# Altium PCB Glog 5G_V1.PcbDoc (part 1 of 3)
Units mil, origin at the board's own origin, x right, y up, seen from the top; angles counter-clockwise.
Board outline 2165.35 x 3838.58 mil, 4 copper layers (Top Layer, GND, PWR, Bottom Layer); 183 components, 150 nets, 767 pads, 1532 vias.
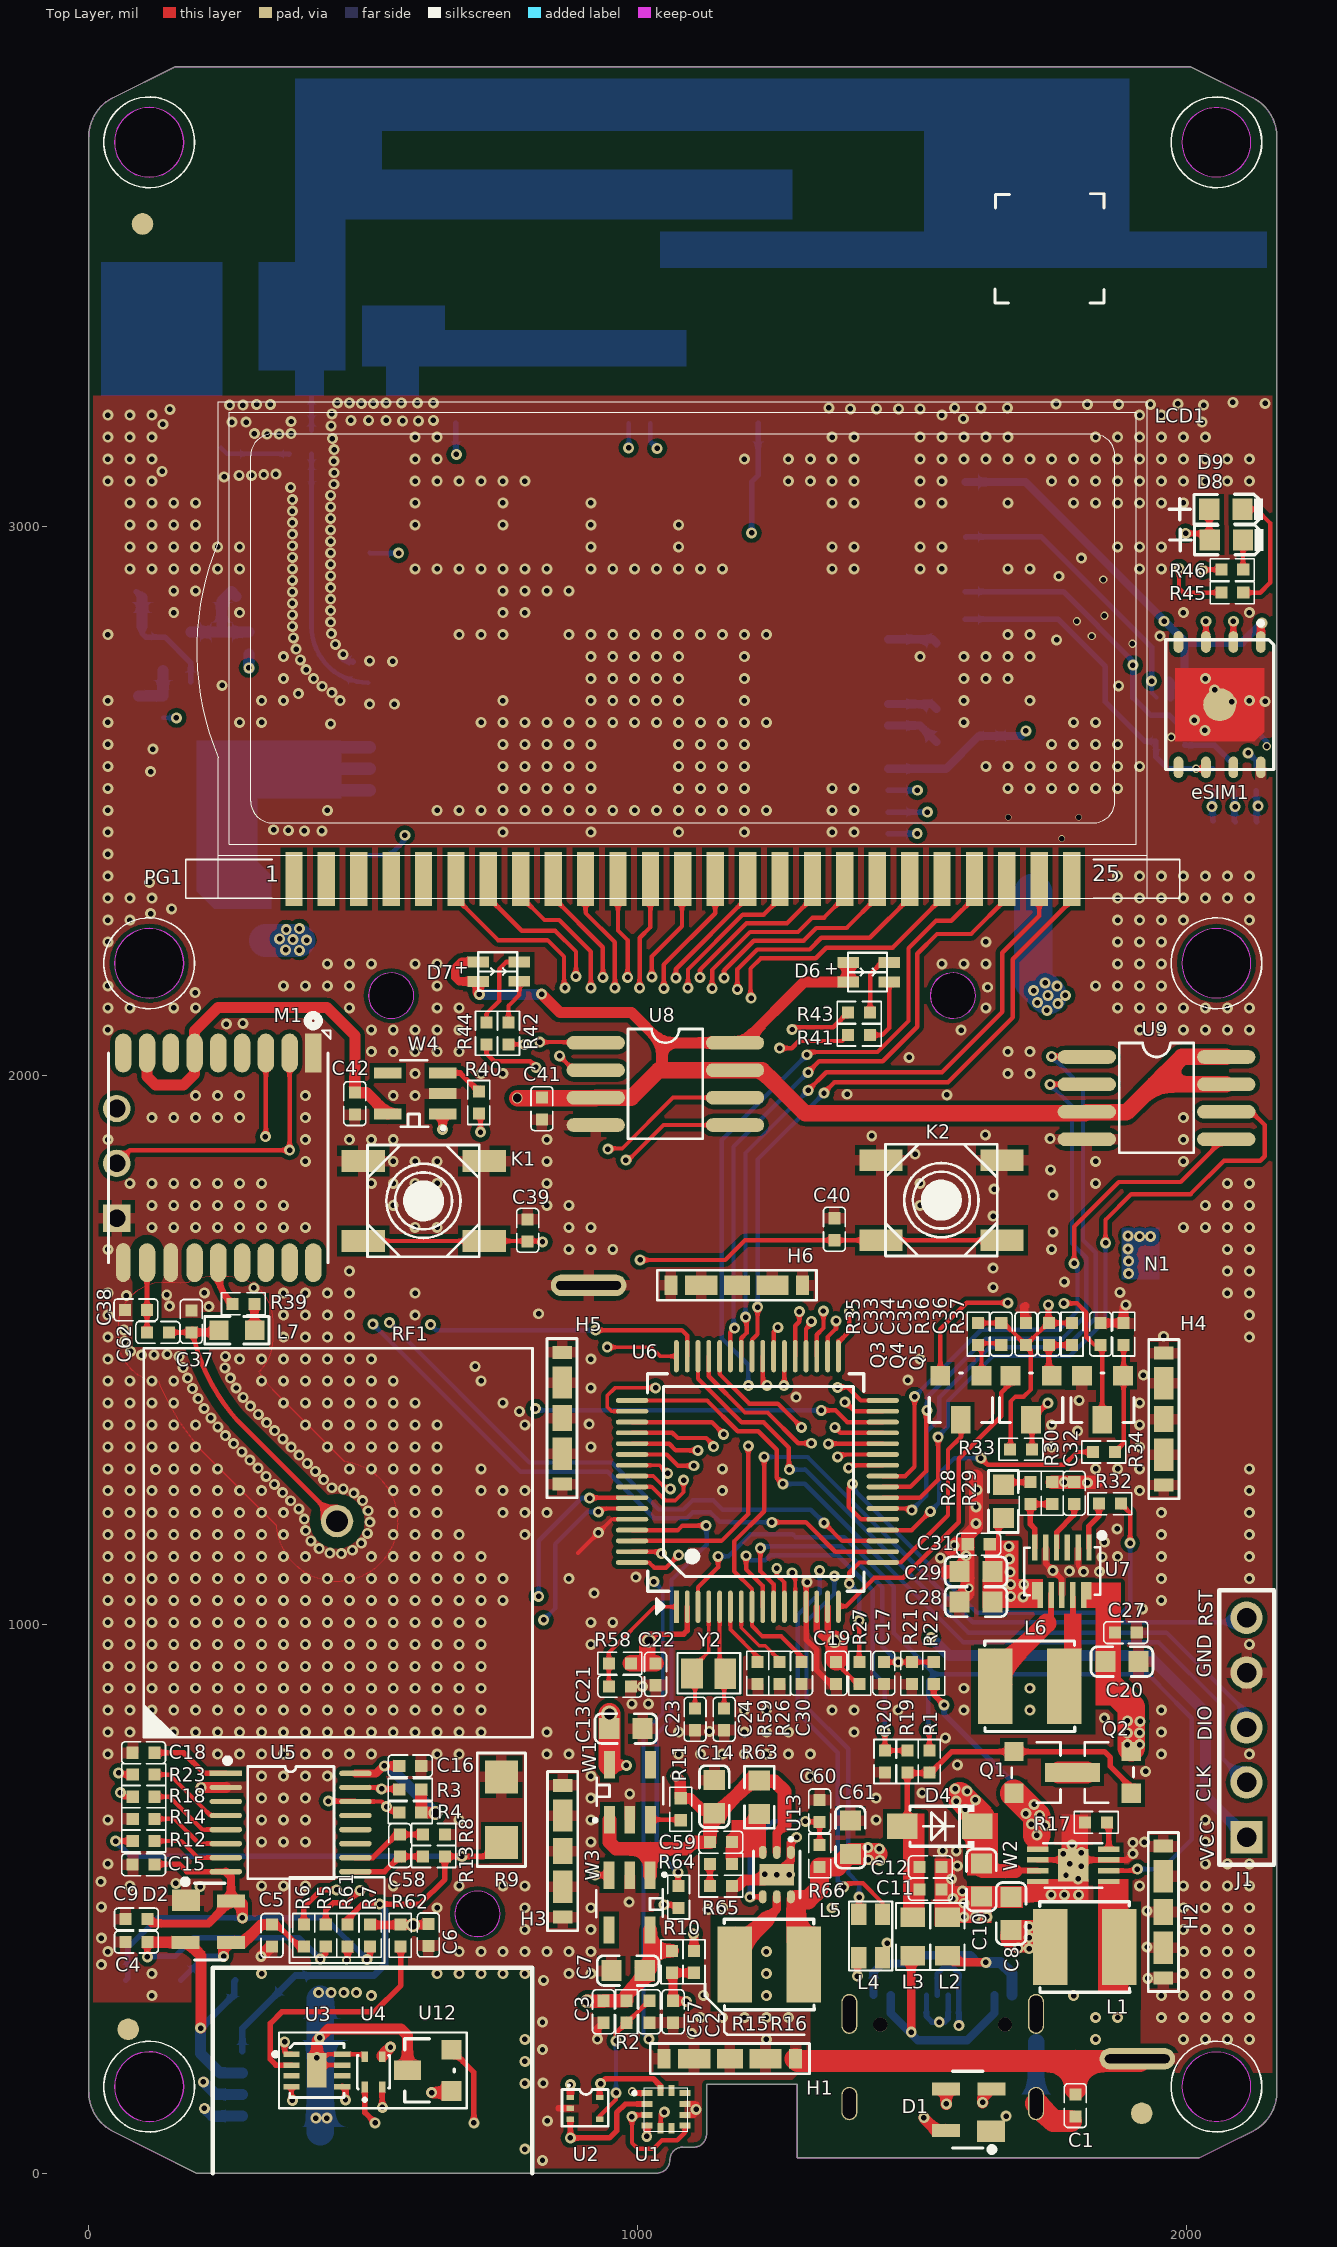
[diagram p0: Top Layer view]
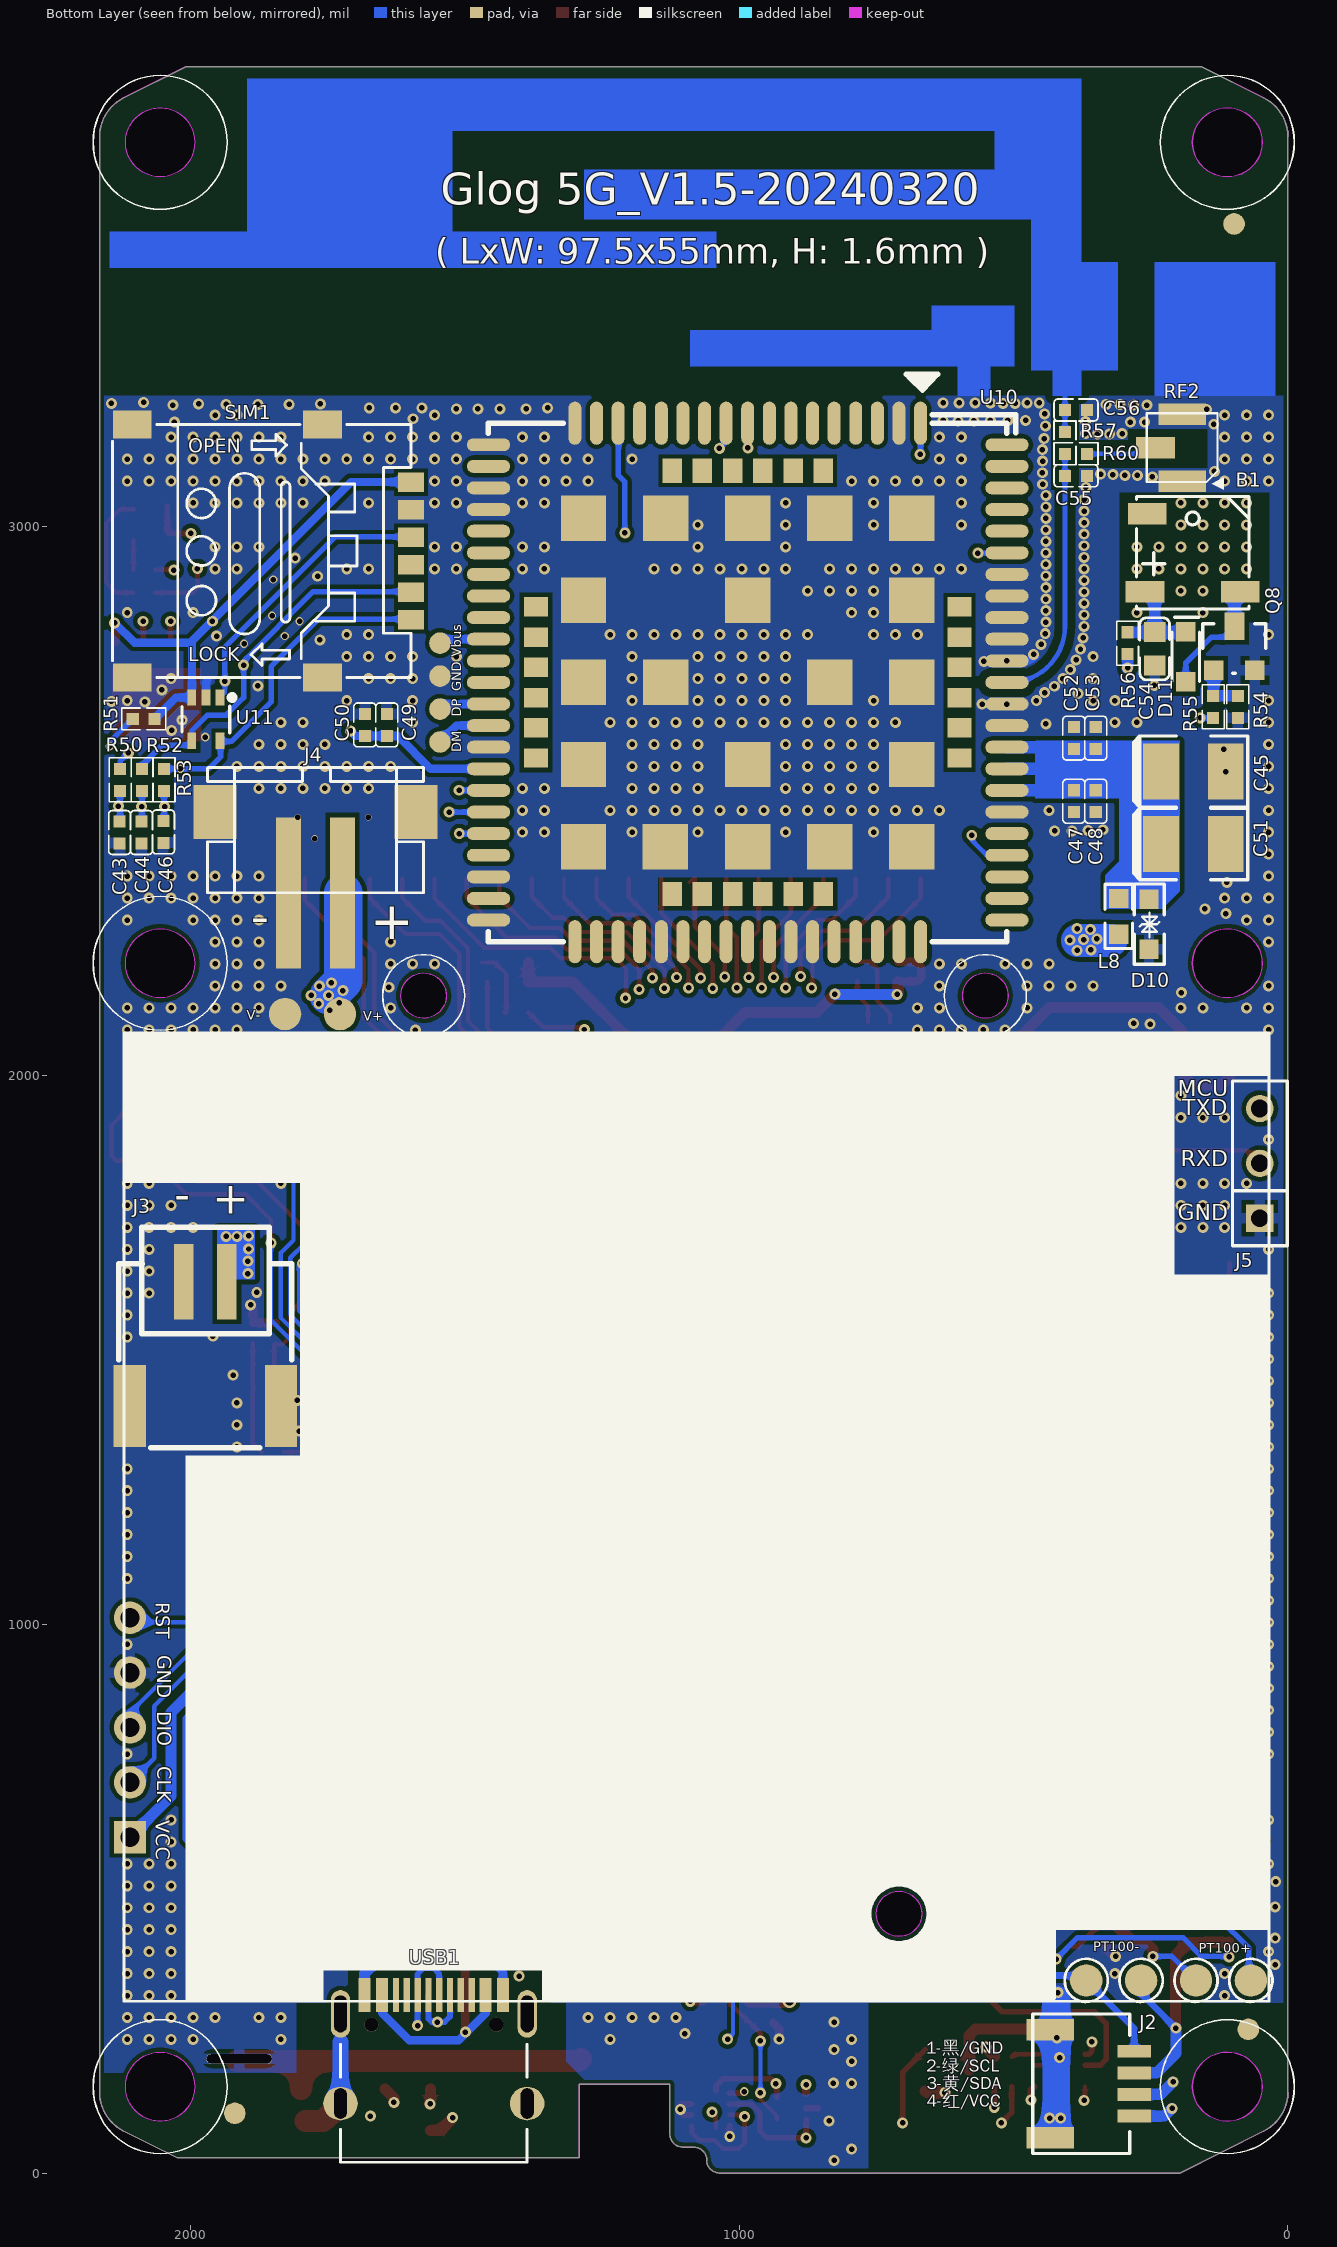
[diagram p1: Bottom Layer view, seen from below]
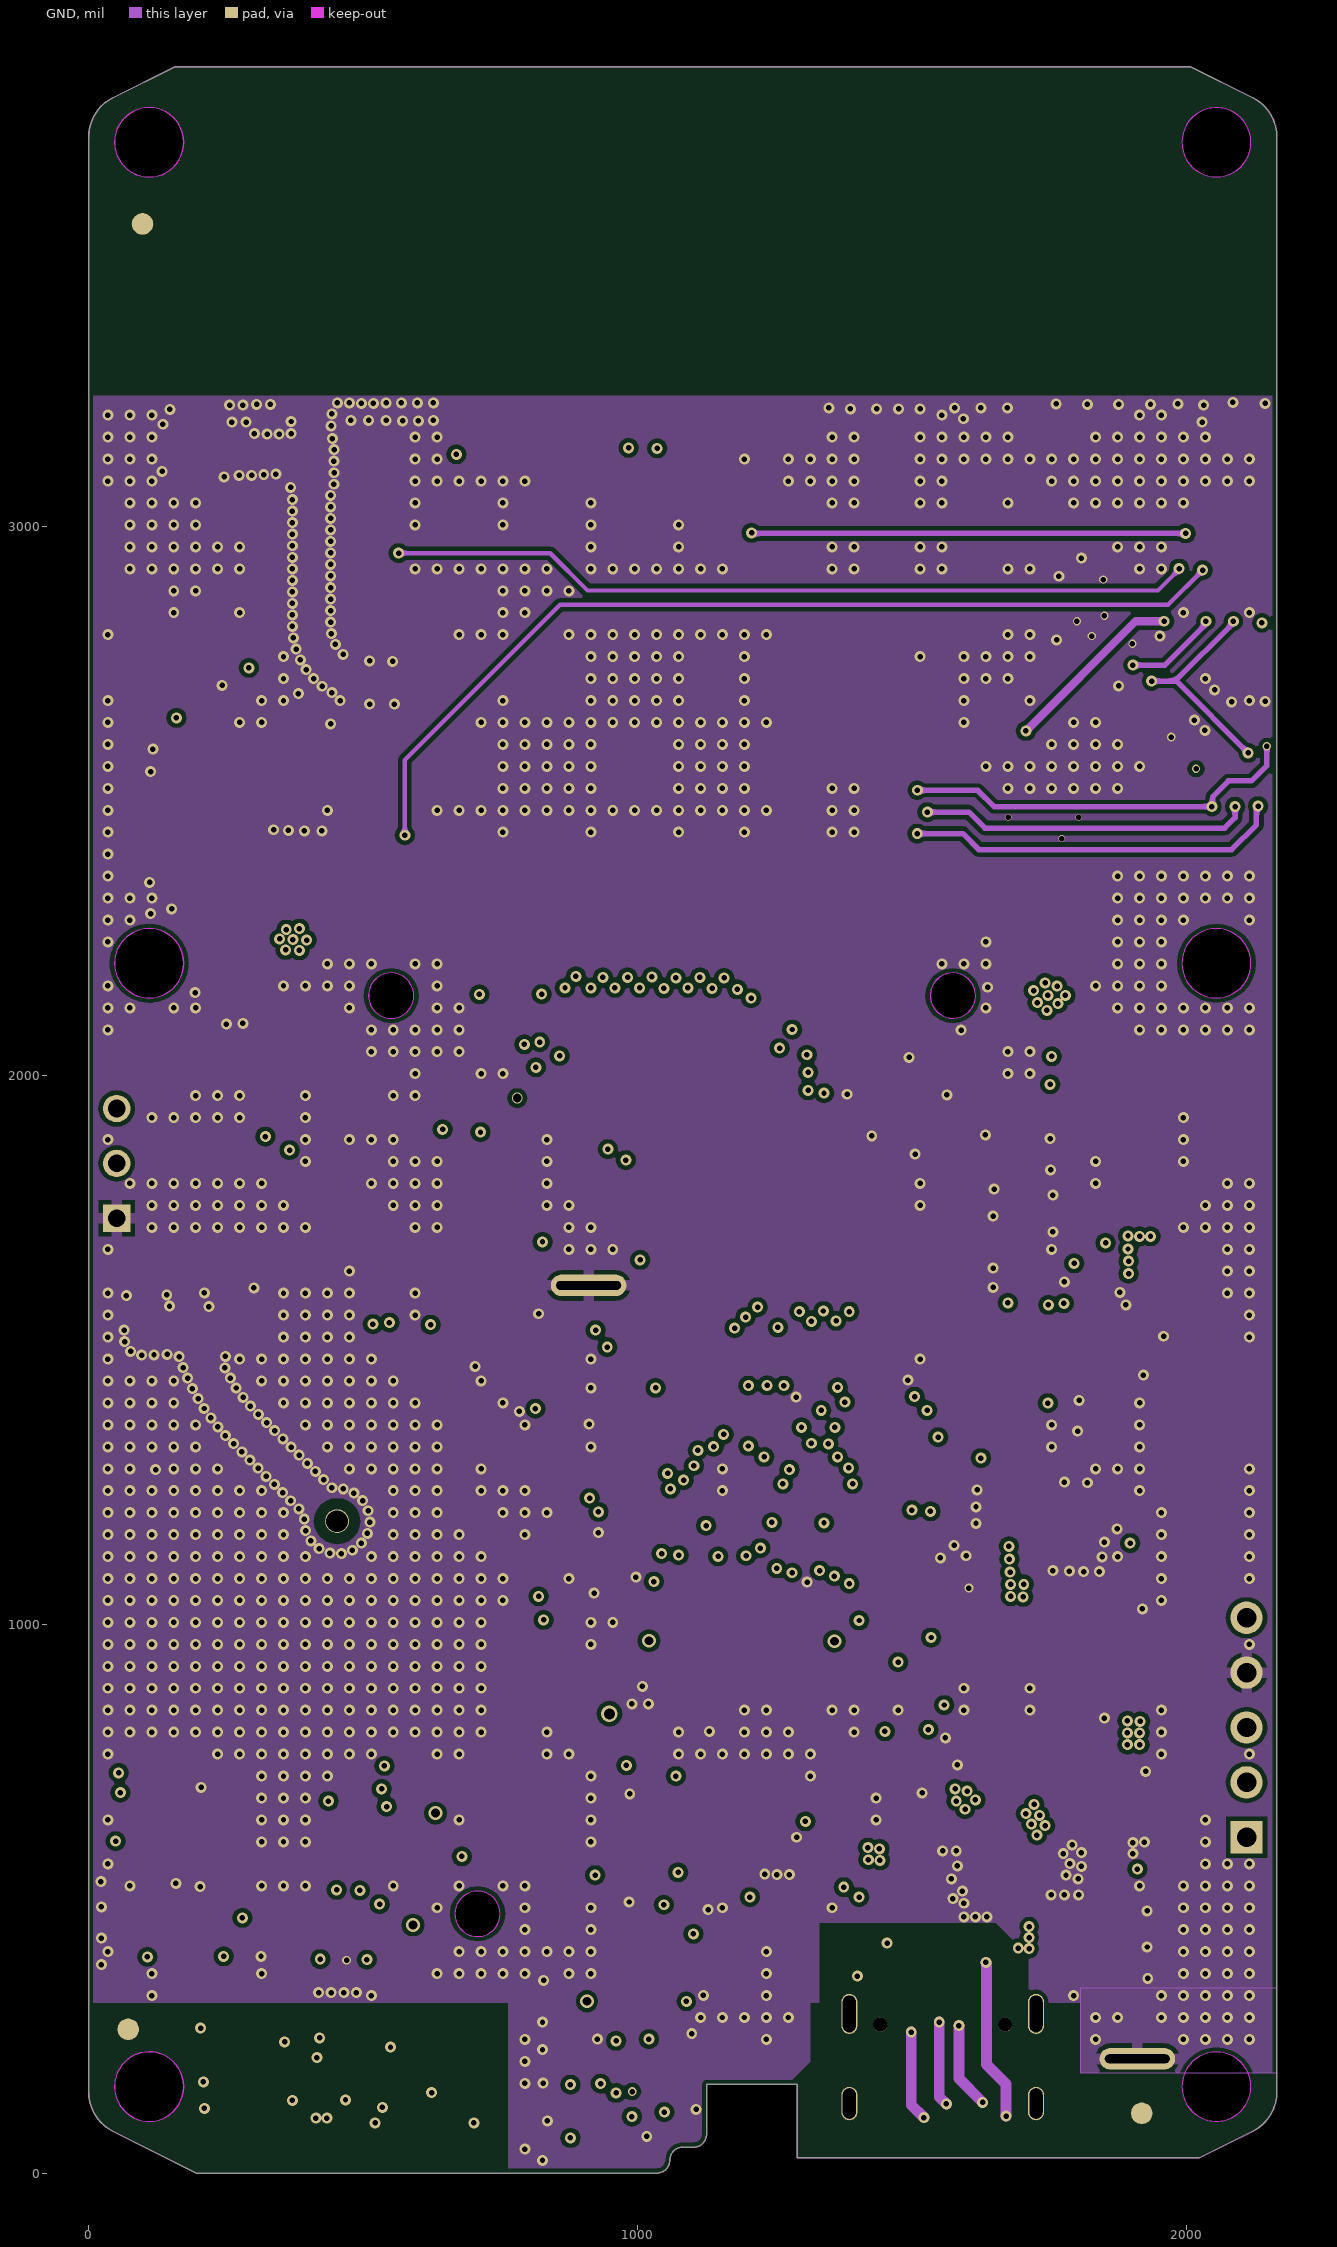
[diagram p2: GND]
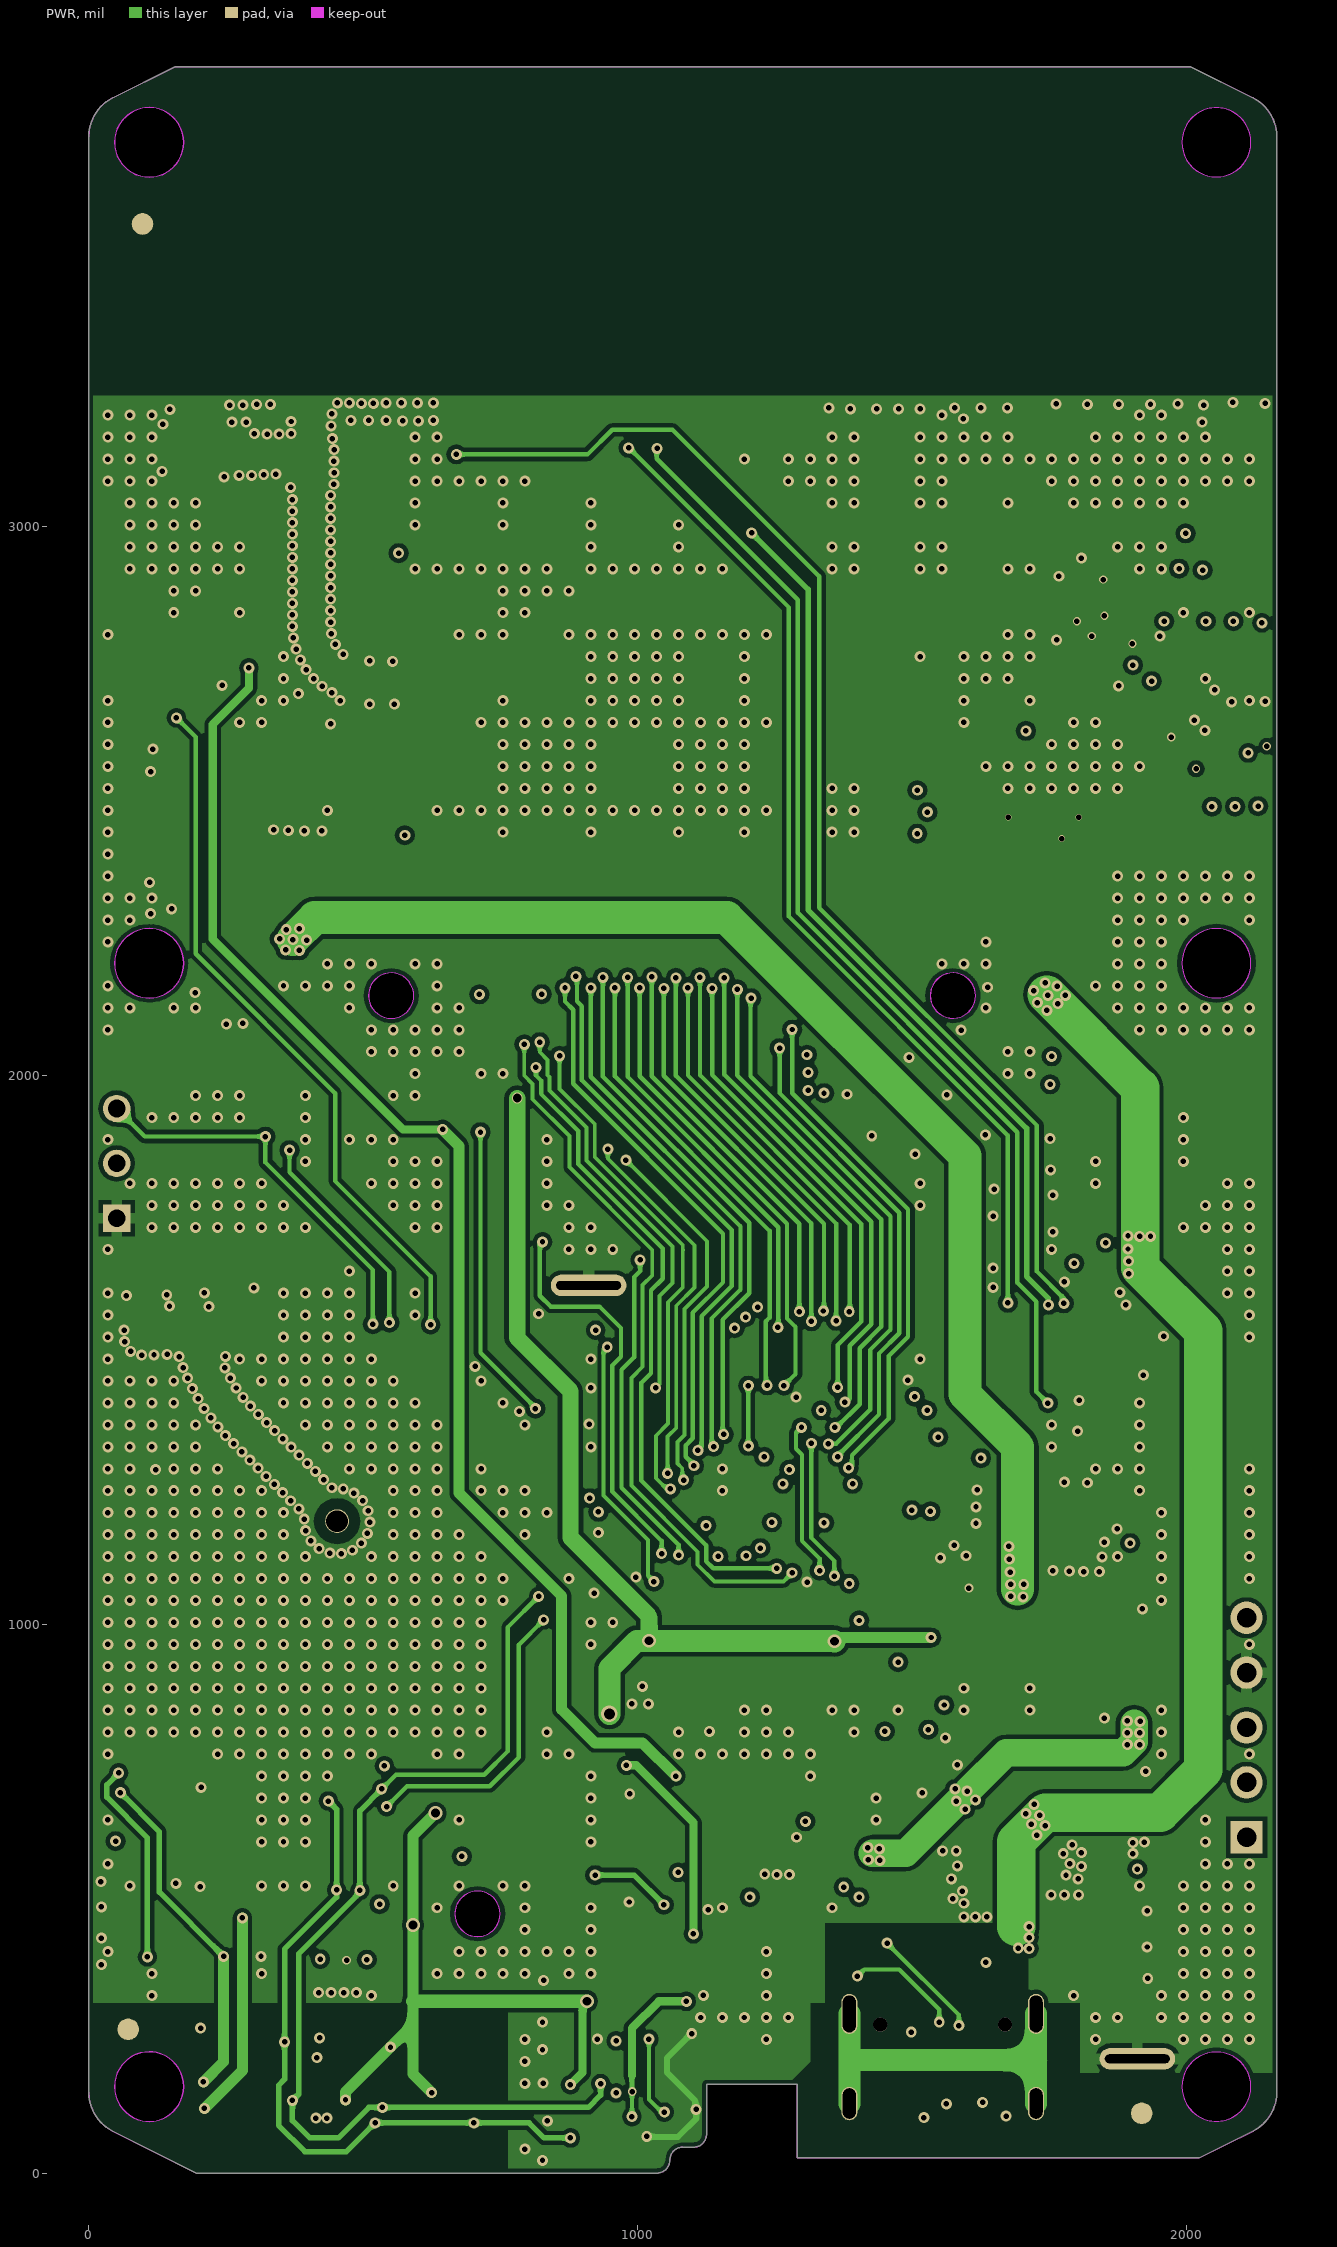
[diagram p3: PWR]

## Layer stack, top to bottom
Top Solder: solder mask 0.4, Solder Resist, Dk 3.5
Top Layer: signal copper 1.4
Dielectric 1: dielectric 12.6, FR-4, Dk 4.8
GND: signal copper 1.4
Dielectric2: dielectric 12.6, FR-4, Dk 4.8
PWR: signal copper 1.4
Dielectric3: dielectric 12.6, FR-4, Dk 4.8
Bottom Layer: signal copper 1.4
Bottom Solder: solder mask 0.4, Solder Resist, Dk 3.5

## Board outline
43.53,76.66 cw(c78.74,147.09) 0,147.09 0,3711.18 cw(c78.74,3711.18) 43.53,3781.61 157.48,3838.58 2007.87,3838.58 2007.97,3838.53 2121.83,3781.61 cw(c2086.61,3711.18) 2165.35,3711.18 2165.35,147.09 cw(c2086.61,147.09) 2121.83,76.66 2023.62,27.56 1291.34,27.56 1291.34,161.42 1125.98,161.42 1125.98,70.87 cw(c1102.36,70.87) 1102.36,47.24 1082.68,47.24 ccw(c1082.68,23.62) 1059.06,23.62 cw(c1035.43,23.62) 1035.43,0 196.85,0
cut-out: 1533.84,2145.81 ccw(c1575.18,2145.81) 1575.18,2104.47 ccw(c1575.18,2145.81) 1616.52,2145.81 ccw(c1575.18,2145.81) 1575.18,2187.15 ccw(c1575.18,2145.81)
cut-out: 667.32,472.44 ccw(c708.66,472.44) 708.66,431.1 ccw(c708.66,472.44) 750,472.44 ccw(c708.66,472.44) 708.66,513.78 ccw(c708.66,472.44)
cut-out: 509.89,2145.77 ccw(c551.23,2145.77) 551.23,2104.43 ccw(c551.23,2145.77) 592.57,2145.77 ccw(c551.23,2145.77) 551.23,2187.11 ccw(c551.23,2145.77)
cut-out: 46.73,3700.79 ccw(c110.24,3700.79) 110.24,3637.28 ccw(c110.24,3700.79) 173.74,3700.79 ccw(c110.24,3700.79) 110.24,3764.29 ccw(c110.24,3700.79)
cut-out: 1992.13,3700.79 ccw(c2055.12,3700.79) 2055.12,3637.8 ccw(c2055.12,3700.79) 2118.11,3700.79 ccw(c2055.12,3700.79) 2055.12,3763.78 ccw(c2055.12,3700.79)
cut-out: 97.78,2142.45 ccw(c110.24,2204.72) 110.24,2141.22 ccw(c110.24,2204.72) 173.74,2204.72 ccw(c110.24,2204.72) 122.69,2267 ccw(c110.24,2204.72) 110.24,2268.23 ccw(c110.24,2204.72) 46.73,2204.72 ccw(c110.24,2204.72)
cut-out: 1992.13,2204.72 ccw(c2055.12,2204.72) 2055.12,2141.73 ccw(c2055.12,2204.72) 2118.11,2204.72 ccw(c2055.12,2204.72) 2055.12,2267.72 ccw(c2055.12,2204.72)
cut-out: 97.78,95.21 ccw(c110.24,157.48) 110.24,93.97 ccw(c110.24,157.48) 173.74,157.48 ccw(c110.24,157.48) 122.69,219.75 ccw(c110.24,157.48) 110.24,220.99 ccw(c110.24,157.48) 46.73,157.48 ccw(c110.24,157.48)
cut-out: 1992.13,157.48 ccw(c2055.12,157.48) 2055.12,94.49 ccw(c2055.12,157.48) 2118.11,157.48 ccw(c2055.12,157.48) 2055.12,220.47 ccw(c2055.12,157.48)

## Design rules (kind name [scope] priority, off if disabled: settings)
Clearance RF1 [InComponent('RF1')] p1: gap=20
Clearance 4G_GPS_ANT [InNet('ANT1')or InNet('ANT_MAIN') or InNet('ANTG1')or InNet('NetC38_1')or InComponent('RF1')or InNet('NetR60_2')] p2: gap=15
Clearance Power_Plane [OnLayer('power') vs InPolygon] p3: gap=12
Clearance GPS2 [InNet('NetC8_1')] p4 off: gap=12
Clearance GPS1 [InNet('NetC7_1')] p5 off: gap=12
Clearance GND [All] p6: gap=7.87
Clearance [All] p7: gap=10
ComponentClearance [All] p1 off: gap=0 collisioncheckmode=3 verticalgap=0 showdistances=TRUE
FabricationTestpoint [(IsPad And (OnTopLayer Or OnBottomLayer))] p1: side=3 testpointundercomponent=TRUE minsize=40 maxsize=100 preferedsize=60 minholesize=0 maxholesize=40 preferedholesize=32 testpointgrid=1 allowsidetop=TRUE allowsidebottom=TRUE usegrid=TRUE gridtolerance=0.01
HoleSize [All] p1: absolutevalues=TRUE maxlimit=150 minlimit=0 maxpercent=80.000 minpercent=20.000
MinimumSolderMaskSliver [All] p1: minsoldermaskwidth=0
PlaneClearance [All] p1: clearance=10
PlaneConnect [All] p1: planeconnectstyle=Direct reliefexpansion=20 reliefentries=4 reliefconductorwidth=10 reliefairgap=10
PolygonConnect RF_RC [InComponent('C56')or InComponent('C55')or InComponent('C38')or InComponent('C37')or InComponent('C45') or InComponent('C51') or InComponent('C47') or InComponent('C48')or InComponent('C52')or InComponent('C53')] p1: connectstyle=Direct reliefconductorwidth=10 reliefentries=4 polygonreliefangle="90 Angle" airgapwidth=10
PolygonConnect [IsVia] p2: connectstyle=Direct reliefconductorwidth=10 reliefentries=4 polygonreliefangle="90 Angle" airgapwidth=10
PolygonConnect SOD-323 [HasFootprint('SOD-323')] p3: connectstyle=Direct reliefconductorwidth=10 reliefentries=4 polygonreliefangle="90 Angle" airgapwidth=10
PolygonConnect 0805-C [HasFootprint('0805_C')] p4: connectstyle=Direct reliefconductorwidth=10 reliefentries=4 polygonreliefangle="90 Angle" airgapwidth=10
PolygonConnect 0603_r [HasFootprint('0603_r')] p5: connectstyle=Relief reliefconductorwidth=10 reliefentries=4 polygonreliefangle="90 Angle" airgapwidth=10
PolygonConnect CASE_C [HasFootprint('CASE-C_6032')] p6: connectstyle=Direct reliefconductorwidth=20 reliefentries=4 polygonreliefangle="90 Angle" airgapwidth=10
PolygonConnect CASE_B [HasFootprint('CASE-B_3528')] p7: connectstyle=Direct reliefconductorwidth=20 reliefentries=4 polygonreliefangle="90 Angle" airgapwidth=10
PolygonConnect SSOP20 [HasFootprint('SSOP20')] p8: connectstyle=Relief reliefconductorwidth=20 reliefentries=4 polygonreliefangle="90 Angle" airgapwidth=10
PolygonConnect SOP8-208mil [HasFootprint('SOP-8-150-208Mil')] p9: connectstyle=Relief reliefconductorwidth=20 reliefentries=4 polygonreliefangle="90 Angle" airgapwidth=10
PolygonConnect SOP8-150mil [HasFootprint('SOP-8-150mil-P')] p10: connectstyle=Relief reliefconductorwidth=20 reliefentries=4 polygonreliefangle="90 Angle" airgapwidth=10
PolygonConnect SMD-3225-4P [HasFootprint('SMD-3225-4P')] p11: connectstyle=Relief reliefconductorwidth=20 reliefentries=4 polygonreliefangle="90 Angle" airgapwidth=10
PolygonConnect SIP4 [HasFootprint('SIP4')] p12: connectstyle=Relief reliefconductorwidth=20 reliefentries=4 polygonreliefangle="90 Angle" airgapwidth=10
PolygonConnect SH1.0-4P [HasFootprint('SH1.0MM-4P')] p13: connectstyle=Relief reliefconductorwidth=20 reliefentries=4 polygonreliefangle="90 Angle" airgapwidth=10
PolygonConnect SIM [HasFootprint('NANO_SIM SMT 翻盖式')] p14: connectstyle=Direct reliefconductorwidth=20 reliefentries=4 polygonreliefangle="90 Angle" airgapwidth=10
PolygonConnect IPEX-3PIN [HasFootprint('IPEX_3PIN') vs InNet('GND')] p15: connectstyle=Direct reliefconductorwidth=20 reliefentries=4 polygonreliefangle="90 Angle" airgapwidth=10
PolygonConnect BAT_CON [InComponent('J3') or InComponent('J4')] p16: connectstyle=Direct reliefconductorwidth=25 reliefentries=4 polygonreliefangle="90 Angle" airgapwidth=10
PolygonConnect GPS [HasFootprint('L76CGPS')] p17: connectstyle=Direct reliefconductorwidth=20 reliefentries=4 polygonreliefangle="90 Angle" airgapwidth=10
PolygonConnect LTE [HasFootprint('A7670xx')] p18: connectstyle=Direct reliefconductorwidth=20 reliefentries=4 polygonreliefangle="90 Angle" airgapwidth=10
PolygonConnect AnyComponent [InAnyComponent] p19: connectstyle=Relief reliefconductorwidth=20 reliefentries=4 polygonreliefangle="90 Angle" airgapwidth=8
PolygonConnect PolygonConnect_1 [All] p20: connectstyle=Direct reliefconductorwidth=10 reliefentries=4 polygonreliefangle="90 Angle" airgapwidth=10
RoutingVias [All] p1: holewidth=11.81 width=23.62 viastyle="Through Hole" minholewidth=8 minwidth=8 maxholewidth=28 maxwidth=50
SilkToSilkClearance [All] p1: silktosilkclearance=0
SilkToSolderMaskClearance [IsPad] p1: minsilkscreentomaskgap=0 clearancetoexposedcopper=TRUE
SolderMaskExpansion [All] p1: expansion=4
Width Width_1 [InNetClass('LCD Class')] p1: maxlimit=10 minlimit=6 preferedwidth=6
Width [All] p2: maxlimit=200 minlimit=5 preferedwidth=10 midlayer1_maxwidth=100 midlayer2_maxwidth=100 minimp=50.000000 maximp=50.000000 favimp=50.000000
22 further rules are at their usual default settings.

## Classes and differential pairs
component class "Glog 5G_V1": B1 C1 C2 C3 C4 C5 C6 C7 C8 C9 C10 C11 C12 C13 C14 C15 C16 C17 C18 C19 C20 C21 C22 C23 C24 C27 C28 C29 C30 C31 C32 C37 C38 C39 C40 C41 C42 C54 C57 C58 C59 C60 C61 C62 D1 D2 D4 D6 D7 D11 H1 H2 H3 H4 H5 H6 J1 J2 J3 J4 J5 K1 K2 L1 L2 L3 L4 L5 L6 L7 LCD1 M1 N1 PG1 Q1 Q2 Q8 R1 R2 R3 R4 R5 R6 R7 R8 R9 R10 R11 R12 R13 R14 R15 R16 R17 R18 R19 R20 R21 R22 R23 R26 R28 R29 R30 R32 R39 R40 R41 R42 R43 R44 R54 R55 R56 R58 R59 R61 R62 R63 R64 R65 R66 RF1 U1 U2 U3 U4 U5 U6 U7 U8 U9 U12 U13 USB1 W1 W2 W3 W4 Y2
component class "Glog 5G_LTE": C33 C34 C35 C36 C43 C44 C45 C46 C47 C48 C49 C50 C51 C52 C53 C55 C56 D8 D9 D10 eSIM1 L8 Q3 Q4 Q5 R27 R33 R34 R35 R36 R37 R45 R46 R50 R51 R52 R53 R57 R60 RF2 SIM1 U10 U11

## Components (designator, comment, footprint, x,y, rotation, side; value= is the part's Value field where it differs from the comment)
B1 "MLT-5020" MLT-5225 260,2882 r90 bottom
C1 "1uF" 0402C 1798,123 r90 top
C2 "0.1uF" 0402C 1065,294 r270 top
C3 "100pF" 0402C 938,294 r270 top
C4 "100pF" 0402C 87,421 r180 top
C5 "100pF" 0402C 334,433 r90 top
C6 "0.1uF" 0402C 619,434 r270 top
C7 "22uF" 0603C 983,369 r180 top
C8 "22uF" 0603C 1681,473 r270 top
C9 "100pF" 0402C 87,463 r0 top
C10 "22uF" 0603C 1627,534 r90 top
C11 "1uF" 0402C 1534,517 r180 top
C12 "0.1uF" 0402C 1534,558 r180 top
C13 "22uF" 0603C 979,810 r0 top
C14 "22uF" 0603C 1140,686 r90 top
C15 "0.1uF" 0402C 100,562 r180 top
C16 "0.1uF" 0402C 586,742 r0 top
C17 "0.1uF" 0402C 1449,911 r270 top
C18 "0.1uF" 0402C 100,766 r0 top
C19 "0.1uF" 0402C 1362,911 r270 top
C20 "22uF" 0603C 1883,932 r0 top
C21 "0.1uF" 0402C 968,887 r180 top
C22 "0.1uF" 0402C 1033,909 r270 top
C23 "12pF" 0402C 1105,827 r90 top
C24 "12pF" 0402C 1158,827 r90 top
C27 "0.1uF" 0402C 1890,985 r180 top
C28 "22uF" 0603C 1617,1041 r180 top
C29 "22uF" 0603C 1617,1096 r180 top
C30 "0.1uF" 0402C 1299,911 r270 top
C31 "0.1uF" 0402C 1622,1146 r0 top
C32 "0.1uF" 0402C 1796,1239 r270 top
C33 "1nF" 0402C 1663,1529 r90 top
C34 "0.1uF" 0402C 1708,1529 r90 top
C35 "1nF" 0402C 1750,1529 r90 top
C36 "1nF" 0402C 1844,1529 r270 top
C37 "100pF" 0402C 187,1552 r90 top
C38 "100pF" 0402C 86,1573 r180 top
C39 "0.1uF" 0402C 800,1718 r270 top
C40 "0.1uF" 0402C 1359,1720 r270 top
C41 "0.1uF" 0402C 825.94,1939.8 r270 top
C42 "0.1uF" 0402C 485,1949 r270 top
C43 "22pF" 0402C 2129,2443 r90 bottom
C44 "22pF" 0402C 2089,2443 r90 bottom
C45 "220uF" 3528C 172,2554 r180 bottom
C46 "22pF" 0402C 2049,2444 r90 bottom
C47 "1uF" 0402C 390,2500 r270 bottom
C48 "0.1uF" 0402C 350,2500 r270 bottom
C49 "0.1uF" 0402C 1642,2639 r90 bottom
C50 "22pF" 0402C 1682,2639 r270 bottom
C51 "220uF" 3528C 172,2422 r180 bottom
C52 "12pF" 0402C 390,2615 r270 bottom
C53 "22pF" 0402C 350,2615 r270 bottom
C54 "10uF" 0603C 242.58,2777.83 r90 bottom
C55 "100pF" 0402C 386,3093 r180 bottom
C56 "100pF" 0402C 386,3213 r180 bottom
C57 "0.1uF" 0402C 1022,294 r270 top
C58 "0.1uF" 0402C 567,597 r270 top
C59 "12pF" 0402C 1152,603 r180 top
C60 "10nF" 0402C 1332,660 r90 top
C61 "22uF" 0603C 1388,612 r90 top
C62 "100pF" 0402C 126,1532 r0 top
D1 "SP0503BAHTG" SP0503 1604,115 r180 top
D2 "SP0503BAHTG" SP0503 218,459 r0 top
D4 "DSK34" SOD-123FL 1551,632 r180 top
D6 "LED_YR" TWO_LED_2COL_0805 1384,2153 r0 top locked
D7 "LED_YR" TWO_LED_2COL_0805 710,2154 r0 top
D8 "LED_G" LED-0603 2043,2976 r0 top
D9 "LED_G" LED-0603 2042,3032 r0 top
D10 "AUSD05FB" BV05C 253,2321 r270 bottom
D11 "1N4148WS" SOD123 186,2718 r90 bottom
eSIM1 "M2M" QFN5*6-8 2061,2676 r180 top
H1 "PBJ" PBZJZ 1168.36,208.28 r180 top locked
H2 "PBJ" PBZJZ 1958.24,475.69 r90 top locked
H3 "PBJ" PBZJZ 863.76,586.61 r270 top locked
H4 "PBJ" PBZJZ 1959.23,1374.02 r90 top locked
H5 "PBJ" PBZJZ 862.77,1375.69 r270 top locked
H6 "PBJ" PBZJZ 1181.1,1617.72 r180 top locked
J1 "SW" HDR1X5 2110,612 r90 top
J2 "4P-1.0mm" SH1.0MM-4P 280,222 r90 bottom
J3 "PH2-2.0" "smd2 dh2" 2012,1776 r0 bottom
J4 "PH2.54-2P" SMD_DH2.54_L 1821,2333 r180 bottom
J5 "MSIP3/2.54" SIP-3(2.54MM) 51,1740 r90 bottom
K1 "KFC0541-0155C" KEY-0505 610.24,1771.65 r0 top locked
K2 "KFC0541-0155C" KEY-0505 1554,1773 r0 top locked
L1 "2.2μH" SMD-4020 1752,412 r90 top
L2 "HCB1608KF" 0805L 1565,431 r90 top
L3 "HCB1608KF" 0805L 1502,431 r90 top
L4 "SMCF2012B900GBE(90R)" SMCF2012 1425,432 r90 top
L5 "2.2μH" SMD-4020 1303,380 r270 top
L6 "2.2μH" SMD-4020 1778,887 r270 top
L7 "68nH" 0603L 270,1536 r180 top
L8 "600R@100MHz" 0603L 308,2290 r90 bottom
LCD1 "LCD_43*23" LCD_43*23*2.8 1082.68,2814.96 r0 top locked
M1 "L76K" L76CGPS 236.22,1850.1 r90 top locked
N1 "PBZ" PBZ_36*28MM 1411,913 r90 top locked
PG1 "PG-25" PG25-L46*W2*H3MM 1082.68,2358.43 r0 top locked
Q1 "CJ3415" SOT-23-MOS 1686,768 r0 top
Q2 "CJ3415" SOT-23-MOS 1900,692 r180 top
Q3 "S9013" SOT23-N#1 1552,1453 r180 top
Q4 "S9013" SOT23-N#1 1680,1453 r180 top
Q5 "S9013" SOT23-N#1 1810,1453 r180 top
Q8 "S9013" SOT23-N#1 60.21,2738.49 r180 bottom
R1 "10K" 0402R 1532,750 r90 top
R2 "10K" 0402R 980,294 r270 top
R3 "10K" 0402R 586,699 r0 top
R4 "10K" 0402R 586,657 r0 top
R5 "100R" 0402R 432,433 r270 top
R6 "100R" 0402R 392,433 r270 top
R7 "0R" 0402R 513,433 r90 top
R8 "51K" 0402R 629,617 r180 top
R9 "2.3K/0.1%" 1206R 752,726 r270 top
R10 "51K" 0402R 1075,503 r270 top
R11 "51K" 0402R 1079,663 r270 top
R12 "10K" 0402R 100.24,605.12 r180 top
R13 "51K" 0402R 629,577 r180 top
R14 "10K" 0402R 100.24,645.48 r180 top
R15 "0R" 0402R 1063,385 r270 top
R16 "0R" 0402R 1103,385 r270 top
R17 "10K" 0402R 1836,639 r0 top
R18 "10K" 0402R 100.24,685.83 r180 top
R19 "100K" 0402R 1492,750 r270 top
R20 "100K" 0402R 1451,750 r90 top
R21 "2M" 0402R 1500,911 r90 top
R22 "2M" 0402R 1540,911 r270 top
R23 "10K" 0402R 100.24,726.19 r180 top
R26 "0R" 0402R 1259,911 r90 top
R27 "10K" 0402R 1405,911 r90 top
R28 "510K" 0603R 1667,1224 r270 top
R29 "100K" 0402R 1716,1239 r90 top
R30 "100K" 0402R 1756,1239 r270 top
R32 "10K" 0402R 1861,1220 r0 top
R33 "10K" 0402R 1699,1319 r0 top
R34 "4.7K" 0402R 1850,1314 r180 top
R35 "4.7K" 0402R 1621,1529 r90 top
R36 "4.7K" 0402R 1792,1529 r90 top
R37 "51K" 0402R 1886,1529 r90 top
R39 "22R" 0402R 282,1584 r0 top
R40 "10K" 0402R 711,1951 r270 top
R41 "2K" 0402R 1404,2074 r180 top
R42 "2K" 0402R 765,2077 r270 top
R43 "2K" 0402R 1404,2115 r180 top
R44 "2K" 0402R 725,2077 r270 top
R45 "2K" 0402R 2084,2880 r0 top
R46 "2K" 0402R 2084,2922 r0 top
R50 "22R" 0402R 2128,2539 r90 bottom
R51 "10K" 0402R 2085,2650 r0 bottom
R52 "22R" 0402R 2088,2539 r90 bottom
R53 "22R" 0402R 2048,2539 r90 bottom
R54 "51K" 0402R 91,2672 r270 bottom
R55 "1K" 0402R 136,2672 r270 bottom
R56 "22R" 0402R 292,2788 r270 bottom
R57 "0R" 0402R 406,3153 r90 bottom
R58 "0R" 0402R 968,929 r180 top
R59 "0R" 0402R 1219,911 r90 top
R60 "0R" 0402R 386,3133 r180 bottom
R61 "0R" 0402R 472,433 r270 top
R62 "10K" 0402R 568,433 r90 top
R63 "510K" 0603R 1222,685 r90 top
R64 "100K" 0402R 1152,563 r0 top
R65 "100K" 0402R 1152,523 r0 top
R66 "10K" 0402R 1332,578 r270 top
RF1 "GPSTX181804" GPSTX_18*18*4MM 454.56,1188 r90 top locked
RF2 "IPX1.1" IPEX_3PIN 192,3083 r180 bottom
SIM1 "NANOSIM1" "NANO_SIM SMT 翻盖式" 1598,2956 r180 bottom locked
U1 "SC7A20TR" LGA-12_L2.0-W2.0-P0.50-BL 1052,116 r270 top
U2 "BH1721FVC" BH1721FVC 904.53,118.11 r0 top locked
U3 "SHT31" SHT3X 415.82,187.01 r0 top
U4 "SHT41" SHT4X 519,184.56 r90 top
U5 "HY3118" TSSOP16 367.98,638.75 r0 top locked
U6 "GD32L233RCT6" LQFP-64 1071,1032 r90 top locked
U7 "MP28164GD-Z" QFN11 1724.41,1131.91 r270 top
U8 "GD25WQ64ESIGR" SOP8 923.94,2059.8 r0 top
U9 "GD25WQ64ESIGR" SOP8 1819,2034 r0 top
U10 "A7670G" A7670XX 984.25,2716.54 r270 bottom locked
U11 "LRC099-04CT1G" SOT-353 1946,2689 r270 bottom
U12 "CT1720" SOT23-N#2 661,224.56 r90 top
U13 "SGM66099B-ADJ" TDFN-6_L2.0-W2.0-P0.65-BL-EP 1254,544 r180 top
USB1 "TYPEC" USB-TYPEC 1726.38,290.06 r270 bottom locked
W1 "SGM2040-3.3" SOT23-5 1023,543 r180 top
W2 "SGM41524" SGM41524 1859.12,531.38 r180 top locked
W3 "SGM2040-3.3" SOT23-5 949,644 r0 top
W4 "SGM2040-3.3" SOT23-5 645,1930 r90 top
Y2 "FC-12M" XTAL_2012 1160,910 r180 top

## Footprints (in the part's own frame and the unit in brackets; to place one, negate y for a bottom-side part, rotate by r counter-clockwise, add the part's x,y. Pads: shape width x height; smd on the part's side, far side on the other; paste and mask are expansions set on the pad)
0402C [mil]
  rect 22x22 smd: 1(-20,0) 2(20,0)
  silkscreen extent -40,-20 40,20, body extent -25,-12 25,12, height 31
0402R [mil]
  rect 22x22 smd: 1(-20,0) 2(20,0)
  silkscreen extent -40,-20 40,20, body extent -23,-12 24,12, height 16
0603C [mm]
  rect 0.93x0.98 smd mask+0.025: 1(-0.77,0) 2(0.77,0)
  silkscreen extent -1.43,-0.69 1.43,0.69, body extent -0.8,-0.4 0.8,0.4, height 0.3
0603L [mil]
  rect 35x35 smd mask+1: 1(-32.5,0) 2(32.5,0)
  silkscreen extent -59,-25 59,25, body extent -32,-16 32,16, height 18
0603R [mm]
  rect 0.93x0.98 smd: 1(-0.77,0) 2(0.77,0)
  silkscreen extent -1.43,-0.69 1.43,0.69, body extent -0.85,-0.4 0.85,0.4
0805L [mil]
  rect 35.43x45 smd mask+1: 1(-35,0) 2(35,0)
  silkscreen extent -61,-31 61,31, body extent -38,-24 40,24, height 37
1206R [mil]
  rect 60x60 smd: 1(3.94,0) 2(123.19,0)
  silkscreen extent -39,-44 167,44, body extent -21,-35 155,35, height 20
3528C [mil]
  rect 65x102.36 smd mask+1: 1(-59.06,0) 2(59.06,0)
  silkscreen extent -109,-65 99,65, body extent -73,-58 73,58, height 80
A7670XX [mm]
  oval 2x0.6 smd paste-100 mask+0.05: 1(-12,8) 2(-12,7) 3(-12,6) 4(-12,5) 5(-12,4) 6(-12,3) 7(-12,2) 8(-12,1) 9(-12,0) 10(-12,-1) 11(-12,-2) 12(-12,-3) 13(-12,-4) 14(-12,-5) 15(-12,-6) 16(-12,-7) 17(-12,-8) 35(12,-8) 36(12,-7) 37(12,-6) 38(12,-5) 39(12,-4) 40(12,-3) 41(12,-2) 42(12,-1) 43(12,0) 44(12,1) 45(12,2) 46(12,3) 47(12,4) 48(12,5) 49(12,6) 50(12,7) 51(12,8)
  oval 0.6x2 smd paste-100 mask+0.05: 18(-8,-12) 19(-7,-12) 20(-6,-12) 21(-5,-12) 22(-4,-12) 23(-3,-12) 24(-2,-12) 25(-1,-12) 26(0,-12) 27(1,-12) 28(2,-12) 29(3,-12) 30(4,-12) 31(5,-12) 32(6,-12) 33(7,-12) 34(8,-12) 52(8,12) 53(7,12) 54(6,12) 55(5,12) 56(4,12) 57(3,12) 58(2,12) 59(1,12) 60(0,12) 61(-1,12) 62(-2,12) 63(-3,12) 64(-4,12) 65(-5,12) 66(-6,12) 67(-7,12) 68(-8,12) 89(-11,-12) 90(-10,-12) 91(-9,-12) 92(9,-12) 93(10,-12) 94(11,-12) 95(11,12) 96(10,12) 97(9,12) 98(-9,12) 99(-10,12) 100(-11,12)
  rect 2.1x2.1 smd paste-100 mask+0.05: 69(-7.6,7.6) 70(-7.6,3.8) 71(-7.6,0) 72(-7.6,-3.8) 73(-7.6,-7.6) 74(-3.8,-7.6) 75(0,-7.6) 76(3.8,-7.6) 77(7.6,-7.6) 78(7.6,-3.81) 79(7.6,0) 80(7.6,3.8) 81(7.6,7.6) 82(3.8,7.6) 83(0,7.6) 84(-3.8,7.6) 85(-3.8,0) 86(0,-3.8) 87(3.8,0) 88(0,3.8)
  rect 1.12x0.9 smd paste-100 mask+0.05: 101(-9.8,3.5) 102(-9.8,2.1) 103(-9.8,0.7) 104(-9.8,-0.7) 105(-9.8,-2.1) 106(-9.8,-3.5)
  rect 0.9x1.1 smd paste-100 mask+0.05: 107(-3.5,-9.8) 108(-2.1,-9.8) 109(-0.7,-9.8) 110(0.7,-9.8) 111(2.1,-9.8) 112(3.5,-9.8) 119(3.5,9.8) 120(2.1,9.8) 121(0.7,9.8) 122(-0.7,9.8) 123(-2.1,9.8) 124(-3.5,9.8)
  rect 1.1x0.9 smd paste-100 mask+0.05: 113(9.8,-3.5) 114(9.8,-2.1) 115(9.8,-0.7) 116(9.8,0.7) 117(9.8,2.1) 118(9.8,3.5)
  silkscreen extent -14.27,-12 12,12.4, body extent -12,-11.97 12.02,11.98, height 2.4
BH1721FVC [mm]
  rect 0.35x0.25 smd: 1(-0.675,0.5) 2(-0.675,0) 3(-0.675,-0.5) 4(0.675,-0.5) 5(0.675,0.5)
  silkscreen extent -1.07,-0.83 1.08,1.09, body extent -1.06,-0.83 1.09,0.86, height 0.8
BV05C [mm]
  rect 0.9x0.9 smd mask+0.025: 1(0,0) 2(2.3,0)
  silkscreen extent -0.71,-0.69 3,0.71, body extent -0.21,-0.61 2.49,0.64, height 1.1
GPSTX_18*18*4MM [mm]
  round 1.5 / inner round 1.1 / far side round 1.5 hole 1: 1(0,0.05)
  silkscreen extent -10,-9 8,9, body extent -10.03,-9 8.02,9, height 4
HDR1X5 [mm] "Connector; Header; 5 Position"
  rect 1.5x1.5 hole 0.9: 1(0,0)
  round 1.5 hole 0.9: 2(2.54,0) 3(5.08,0) 4(7.62,0) 5(10.16,0)
  silkscreen extent -1.27,-1.27 11.43,1.27
IPEX_3PIN [mm]
  rect 1.8x1 smd mask+0.025: 1(-1.245,1.55)
  rect 2.2x1 smd mask+0.025: 2(0,0) 2(0,3.1)
  silkscreen extent -1.65,-0.39 1.91,3.15, body extent -1.55,0.05 1.55,3.05, height 1.25
KEY-0505 [mm]
  rect 2x1 smd mask+0.025: 1(-2.794,-1.854) 1(2.805,-1.854) 2(-2.794,1.846) 2(2.805,1.846)
  silkscreen extent -2.59,-2.59 2.58,2.59, body extent -3.2,-2.6 3.2,2.6, height 1.5
L76CGPS [mm]
  rect 1.8x0.762 smd mask+0.025: 1(4.85,-4.4)
  rrect100% 1.8x0.762 smd mask+0.025: 2(4.85,-3.3) 3(4.85,-2.2) 4(4.85,-1.1) 5(4.85,0) 6(4.85,1.1) 7(4.85,2.2) 8(4.85,3.3) 9(4.85,4.4) 11(-4.85,3.3) 13(-4.85,1.1) 14(-4.85,0) 15(-4.85,-1.1) 16(-4.85,-2.2) 17(-4.85,-3.3) 18(-4.85,-4.4)
  rrect100% 1.8x0.66 smd mask+0.025: 10(-4.85,4.4) 12(-4.85,2.2)
  silkscreen extent -4.85,-5.2 6.6,5.08
LCD_43*23*2.8 [mil] "导电条连接段码屏"
  silkscreen extent -886,-492 846,413, body extent -846,-492 846,413, height 110
LED-0603 [mm]
  rect 0.93x0.98 smd: 1(0,0) 2(1.54,0)
  silkscreen extent -1.86,-0.69 2.5,0.7, body extent -0.03,-0.4 1.57,0.4, height 0.6
LGA-12_L2.0-W2.0-P0.50-BL [mm]
  rect 0.28x0.5 smd paste+0 mask+0.051: 1(-0.75,-0.875) 2(-0.25,-0.875) 3(0.25,-0.875) 4(0.75,-0.875) 7(0.75,0.875) 8(0.25,0.875) 9(-0.25,0.875) 10(-0.75,0.875)
  rect 0.5x0.28 smd paste+0 mask+0.051: 5(0.875,-0.25) 6(0.875,0.25) 11(-0.875,0.25) 12(-0.875,-0.25)
  silkscreen extent -1,-1.53 1,1
LQFP-64 [mm]
  rect 1.5x0.22 smd: 1(0,0)
  oval 1.5x0.22 smd: 2(0,-0.5) 3(0,-1) 4(0,-1.5) 5(0,-2) 6(0,-2.5) 7(0,-3) 8(0,-3.5) 9(0,-4) 10(0,-4.5) 11(0,-5) 12(0,-5.5) 13(0,-6) 14(0,-6.5) 15(0,-7) 16(0,-7.5) 33(11.6,-7.5) 34(11.6,-7) 35(11.6,-6.5) 36(11.6,-6) 37(11.6,-5.5) 38(11.6,-5) 39(11.6,-4.5) 40(11.6,-4) 41(11.6,-3.5) 42(11.6,-3) 43(11.6,-2.5) 44(11.6,-2) 45(11.6,-1.5) 46(11.6,-1) 47(11.6,-0.5) 48(11.6,0)
  oval 0.22x1.5 smd: 17(2.05,-9.55) 18(2.55,-9.55) 19(3.05,-9.55) 20(3.55,-9.55) 21(4.05,-9.55) 22(4.55,-9.55) 23(5.05,-9.55) 24(5.55,-9.55) 25(6.05,-9.55) 26(6.55,-9.55) 27(7.05,-9.55) 28(7.55,-9.55) 29(8.05,-9.55) 30(8.55,-9.55) 31(9.05,-9.55) 32(9.55,-9.55) 49(9.55,2.05) 50(9.05,2.05) 51(8.55,2.05) 52(8.05,2.05) 53(7.55,2.05) 54(7.05,2.05) 55(6.55,2.05) 56(6.05,2.05) 57(5.55,2.05) 58(5.05,2.05) 59(4.55,2.05) 60(4.05,2.05) 61(3.55,2.05) 62(3.05,2.05) 63(2.55,2.05) 64(2.05,2.05)
  silkscreen extent -0.33,-8.68 10.79,1.34, body extent 0.65,-8.76 10.86,1.41, height 2.02
MLT-5225 [mm]
  rect 1x1.8 smd: 1(0,0) 2(0,-4.402) 3(3.601,-0.099)
  silkscreen extent -0.8,-4.8 4.4,0.4, body extent -0.83,-4.82 4.42,0.43, height 2.5
"NANO_SIM SMT 翻盖式" [mm]
  rect 1.8x1.3 smd: 0(-12.9,-5.85) 0(-12.9,5.85) 0(-4.1,-5.85) 0(-4.1,5.85)
  rect 1.2x0.9 smd: C1(0,3.175) C2(0,0.635) C3(0,-1.905) C5(0,1.905) C6(0,-0.635) C7(0,-3.175)
  silkscreen extent -13.82,-5.85 0,5.85
PBZ_36*28MM [mm]
  oval 1x3.5 / inner oval 1x3.5 / far side oval 0.45x3.05 hole 0.4 slot 3 at 90 deg: 1(-17.9,-12.7) 1(17.9,12.7)
  body extent -18.1,-14.05 18.1,14.1, height 2.4
PBZJZ [mm]
  rect 0.6x0.9 smd mask+0.025: 1(-3.05,0) 1(3.05,0)
  rect 1.5x0.9 smd mask+0.025: 1(-1.65,0) 1(1.65,0)
  rect 1.2x0.9 smd mask+0.025: 1(0,0)
  silkscreen extent -3.68,-0.7 3.68,0.69
PG25-L46*W2*H3MM [mm]
  rect 0.8x2.5 smd: 1(-18,0) 2(-16.5,0) 3(-15,0) 4(-13.5,0) 5(-12,0) 6(-10.5,0) 7(-9,0) 8(-7.5,0) 9(-6,0) 10(-4.5,0) 11(-3,0) 12(-1.5,0) 13(0,0) 14(1.5,0) 15(3,0) 16(4.5,0) 17(6,0) 18(7.5,0) 19(9,0) 20(10.5,0) 21(12,0) 22(13.5,0) 23(15,0) 24(16.5,0) 25(18,0)
  silkscreen extent -23,-0.9 23,0.9, body extent -22.99,-0.89 22.99,0.89, height 2.79
QFN5*6-8 [mm]
  round 1.524 smd: 0(0,0)
  oval 0.45x1 smd paste-0.05 mask+0.1: C1(-1.905,-2.9) C2(-0.635,-2.9) C3(0.635,-2.9) C4(1.905,-2.9) C5(-1.905,2.9) C6(-0.635,2.9) C7(0.635,2.9) C8(1.905,2.9)
  Top Layer region: -1.605,1.702 2.052,1.702 2.052,-1.694 -2.057,-1.694 -2.057,1.25
  silkscreen extent -2.5,-3.82 2.5,3, body extent -2.5,-3 2.51,3, height 1.5
QFN11 [mm]
  rect 1.2x0.25 smd mask+0.025: 1(-0.2,2.5) 2(-0.2,2) 3(-0.2,1.5) 4(-0.2,1) 5(-0.2,0.5) 6(-0.2,0) 7(2,0.25) 8(2,0.75) 9(2,1.25) 10(2,1.75) 11(2,2.25)
  rect 0.8x0.25 smd mask+0.025: 7(1.8,0) 11(1.8,2.5)
  silkscreen extent -0.89,-0.5 2,3.22, body extent -0.2,-0.49 1.99,3.02, height 0.5
SGM41524 [mm]
  rect 1.4x1.5 smd: 0(1.65,-0.75)
  rect 1x0.25 smd: 1(0,0) 2(0,-0.5) 3(0,-1) 4(0,-1.5) 5(3.3,-1.5) 6(3.3,-1) 7(3.3,-0.5) 8(3.3,0)
  round 0.5 on Top Overlay: 2(0.422,0.614)
  silkscreen extent 0.3,-1.78 3.04,0.29
SH1.0MM-4P [mm]
  rect 0.6x1.55 smd mask+0.025: 1(0,0) 2(-1,0) 3(-2,0) 4(-3,0)
  rect 1x2.2 smd mask+0.025: 5(1,3.886) 6(-4,3.886)
  silkscreen extent -4.73,0.2 1.73,4.7, body extent -4.72,0.2 1.73,4.67, height 3.3
SHT3X [mm] "SHT3X-DIS"
  rect 0.9x1.6 smd: 0(0,0)
  rect 0.75x0.25 smd: 1(-1.175,0.75) 2(-1.175,0.25) 3(-1.175,-0.25) 4(-1.175,-0.75) 5(1.175,-0.75) 6(1.175,-0.25) 7(1.175,0.25) 8(1.175,0.75)
  silkscreen extent -1.93,-1.25 1.25,1.25, body extent -1.25,-1.24 1.25,1.24, height 1
SHT4X [mm] "U"
  rect 0.5x0.3 smd: 1(-0.7,0.4) 2(-0.7,-0.4) 3(0.7,-0.4) 4(0.7,0.4)
  silkscreen extent -1.29,-0.75 0.75,0.75, body extent -0.77,-0.75 0.74,0.71, height 0.6
SIP-3(2.54MM) [mil]
  rect 50x50 hole 32: 1(0,0)
  round 50 hole 32: 2(100,0) 3(200,0)
  silkscreen extent -50,-50 250,50
SMCF2012 [mm]
  rect 1x0.7 smd mask+0.025: 1(-1,0.55) 2(1,0.55) 3(-1,-0.55) 4(1,-0.55)
  silkscreen extent -1.6,-1 1.6,1
"smd2 dh2" [mm]
  rect 1.5x3.8 smd mask+0.025: 1(-4.499,9.6) 1(2.501,9.6)
  rect 0.9x3.5 smd mask+0.025: 1(0,3.85) 2(-2,3.85)
  silkscreen extent -5,1.33 3,11.53
SMD-4020 [mm]
  rect 3.5x1.6 smd mask+0.051: 1(0,0) 2(0,-3.2)
  silkscreen extent -2.1,-3.68 2.1,0.48, body extent -1.77,-3.77 1.79,0.55, height 2
SMD_DH2.54_L [mm]
  rect 2x2.5 smd: 1(-3.4,3.75) 1(5.9,3.75)
  rect 1.15x7 smd: 1(0,0) 2(2.5,0)
  silkscreen extent -3.75,0 6.25,5.8, body extent -3.76,0 6.25,5.83, height 6.7
SOD123 [mm]
  rect 0.9x0.9 smd mask+0.025: A(0,0) K(2.3,0)
  silkscreen extent 0,-0.64 2.98,0.64, body extent -0.21,-0.61 2.49,0.64, height 1.1
SOD-123FL [mm]
  rect 1.4x1.2 smd: A(1.735,0) K(-1.735,0)
  silkscreen extent -1.6,-1 1.38,1
SOP8 [mm] "150-208mil"
  oval 2.7x0.635 smd mask+0.025: 1(0,0) 2(0,-1.27) 3(0,-2.54) 4(0,-3.81) 5(6.45,-3.81) 6(6.45,-2.54) 7(6.45,-1.27) 8(6.45,0)
  silkscreen extent 1.5,-4.44 4.95,0.64, body extent -0.84,-4.62 7.29,0.87, height 1.9
SOT23-5 [mil]
  rect 20x50 smd mask+1: 1(0,0) 2(37,0) 3(75,0) 4(75,100) 5(0,100)
  silkscreen extent -27,-2 98,77, body extent -22,-9 96,109, height 59
SOT23-N#1 [mil]
  rect 36x36 smd: B(-75,0) E(0,0)
  rect 36x50 smd: C(-37,80)
  silkscreen extent -95,-5 20,85, body extent -96,-2 22,87, height 59
SOT23-N#2 [mil]
  rect 36x36 smd mask+1: B(-75,0) E(0,0)
  rect 36x50 smd mask+1: C(-37,80)
  silkscreen extent -95,-5 20,85, body extent -96,-2 22,87, height 59
SOT-23-MOS [mil]
  rect 35x35 smd mask+1: 1(0,0) 2(0,-76)
  rect 50x35 smd mask+1: 3(82,-38)
  silkscreen extent -4,-93 85,17, body extent -6,-95 86,19, height 39
SOT-353 [mil]
  rect 30x15.75 smd mask+1: 1(0,0) 2(0,-25.59) 3(0,-51.18) 4(79,-51.18) 5(79,0)
  silkscreen extent -5,-69 64,27, body extent -5,-67 85,15, height 39
SP0503 [mm]
  rect 1.3x1 smd: 1(-1.03,0.978)
  rect 1.3x0.6 smd: 2(-1.05,-0.978) 3(1.05,-0.978) 4(1.05,0.942)
  silkscreen extent -1.19,-1.8 0.76,1.95
TDFN-6_L2.0-W2.0-P0.65-BL-EP [mm]
  oval 0.364x0.607 smd: 1(-0.65,-1.028) 2(0,-1.028) 3(0.65,-1.028) 4(0.65,1.028) 5(0,1.028) 6(-0.65,1.028)
  rect 1.6x1 smd: 1(0,0)
  silkscreen extent -1.08,-1.71 1.08,1.08
TSSOP16 [mm]
  rect 1.5x0.25 smd: 1(-3,2.275)
  oval 1.5x0.25 smd: 2(-3,1.625) 3(-3,0.975) 4(-3,0.325) 5(-3,-0.325) 6(-3,-0.975) 7(-3,-1.625) 8(-3,-2.275) 9(3,-2.275) 10(3,-1.625) 11(3,-0.975) 12(3,-0.325) 13(3,0.325) 14(3,0.975) 15(3,1.625) 16(3,2.275)
  silkscreen extent -3.04,-2.6 2.01,2.99
TWO_LED_2COL_0805 [mm]
  rect 1x0.5 smd mask+0.025: 1(0,1.35) 2(0,0.45) 3(1.9,0.451) 4(1.9,1.35)
  silkscreen extent 0,0 1.8,1.8
USB-TYPEC [mm]
  oval 2.2x0.9 / inner oval 1.85x0.75 / far side oval 1.85x0.75 hole 0.6 slot 1.7 at 0 deg: 1(0,0) 2(0,8.64)
  oval 1.55x1.6 / inner oval 1.55x0.75 / far side oval 1.55x0.75 hole 0.6 slot 1.4 at 0 deg: 3(4.15,0) 4(4.15,8.64)
  rect 1.554x0.55 smd paste+0: A1B12(-0.875,1.12) A4B9(-0.875,1.92)
  rect 1.554x0.29 smd paste+0: A5(-0.875,3.07) A6(-0.875,4.07) A7(-0.875,4.57) A8(-0.875,5.57) B6(-0.875,5.07) B7(-0.875,3.57) B8(-0.875,2.57)
  rect 1.554x0.55 smd: B1A12(-0.875,7.52) B4A9(-0.875,6.72)
  rect 1.554x0.29 smd: B5(-0.875,6.07)
  round 0.65 hole 0.65 unplated: ""(0.5,1.43) ""(0.5,7.21)
  silkscreen extent 1.41,0 6.87,8.64
XTAL_2012 [mm]
  rect 1x1.4 smd: 1(0,0) 2(1.538,-0.014)
  silkscreen extent -0.69,-0.96 2.21,0.92

## Part data
B1: library part "MLT-5020 5X5X2mm"
C1 C11 C47: library part CC-0402-16V-105±10%
C2 C6 C12 C15 C16 C17 C18 C19 C21 C22 C27 C30 C31 C32 C34 C39 C40 C41 C42 C43 C44 C46 C48 C49 C50 C53 C57 C58: library part CC-0402-50V-104±20%
C3 C4 C5 C9 C55 C56: library part CC-0402-50V-101±5﹪
C7 C8 C10 C13 C14 C20 C28 C29 C61: library part CC-0603-X5R-10V-226±20%
C23 C24 C52 C59: library part CC-0402-50V-NPO-12pF±5%
C33 C35 C36: library part CC-0402-X7R-50V-102±10%,风华高科,RoHS
C37 C38 C62: library part CC-0402-50V-COG-100pF±5%pF
C45 C51: library part 220μF/6.3V/CASE-B_3528±20﹪
C54: library part CC-0603-X7R-10V-106±20%
C60: library part CC-0402-50V-103±10%
D1 D2: library part SP0503BAHTG,电压瞬态抑制器
D4: library part DSK34,SOD-123FL,肖特基
D6 D7: library part 发光管0805双色红绿共阴
D8 D9: library part 0603,绿色
D10: library part AUSD05FB,SOD-323,ESD
D11: library part 1N4148WS,SOD323
eSIM1 SIM1: library part NANOSIM1.4H6P掀盖式
H1 H2 H3 H4 H5 H6: library part "KD-PBJ001,6.5*0.8*1.28mm,材质SUS304,镀镍 镀锡,屏蔽罩夹子"
J1: library part CON5, "Connector"
J2: library part 4P座子,1.0mm,贴片
J3: library part PH-2P-2.0,卧式贴片插座,米白色
J4: library part PH2.0-2P胶壳,立贴片90度弯针插座,编带
J5: library part 1*3PIN-直脚-2.54mm
K1 K2: library part KFC-0541-0155C,编带
L1 L5 L6: library part WPN4020H2R2MT
L2 L3: library part HCB1608KF-800T30
L4: library part SMCF2012B900GBE(90R),共模,贴片
L7: library part 68nH/±5%,0603,贴片
L8: library part CGB160808U601T/600R@100MHz,0603
LCD1: library part LCD_43*23*2.8mm-导电条连接
M1: library part "Quectel L76K GPS+北斗+QZSS+GLONASS+Galileo,LCC,超小尺寸,超低功耗,紧凑型多系统联合定位GNSS模块"
N1: library part 金属屏蔽盖,36*28*2.4mm-0.2mm
PG1: library part PG-25?导电条?46*2*3?全导电
Q3 Q4 Q5 Q8 U12: library part S9013,SOT-23
R1 R2 R3 R4 R12 R14 R17 R18 R23 R27 R33 R40 R51 R62 R66: library part RC-0402-1/16W-10K±5%
R5 R6: library part RC-0402-1/10W-100±1%
R7 R15 R16 R26 R32 R57 R58 R59 R60 R61: library part RC-0402-1/16W-0±1%
R8 R13: library part RC-0402-1/16W-51K±1%,风华高科,RoHS
R9: library part RC-0204-1/4W-200±0.1%,金属膜电阻
R10 R11 R37 R54: library part RC-0402-1/16W-51K±1%
R19 R20 R29 R30 R64 R65: library part RC-0402-1/16W-100K±1%
R21 R22: library part RC-0402-1/16W-2M±1%
R28 R63: library part RC-0603-1/16W-510K±1%
R34 R35 R36: library part RC-0402-1/16W-4.7K±1%
R39 R50 R52 R53 R56: library part RC-0402-1/16W-22±1%
R41 R42 R43 R44 R45 R46: library part RC-0402-1/16W-2K±5%
R55: library part RC-0402-1/16W-1K±5%
RF1: library part "GPS陶瓷有源天线 18X18X4MM PCB焊接"
RF2: library part IPX座子,UFL-R-SMT_01
U2: library part 光照传感器,BH1721FVC,WSOF5,ROHM,RoHS
U3: library part SHT31,贴片
U4: library part SHT41-DFN4
U5: library part HY3118,SSOP-16,AD转换器
U6: library part GD32L233RCT6,LQFP64
U8 U9: library part "GD25WQ64ESIGR SOP8 208mil", "xx25X16_32"
U10: library part A7670E,LTE-Cat1,GSM,欧版,LGA
U11: library part LESDA6V8AW5T1G
U13: library part SGM66099B-ADJYTDI6G/TR
USB1: library part "USB,TYPE-C 连接器,母座单排,16P,SMT四脚插板"
W1 W3 W4: library part SGM2040-3.3YN5G/TR,SOT-23-5,贴片
W2: library part SGM41524C,TDFN-2×3-8BL
Y2: library part FC-135,32.768KHz,12.5±20PPM

## Free pads (board coordinates)
  round 39.37 all layers, no hole mask+1: 1(72,262) 1(98,3552) 1(1919,109)
  round 59.06 smd far side: 10(67.35,351.06) 10(167.35,351.06) 10(267.35,351.06) 10(367.35,351.06) 10(1727.35,2112.06) 10(1827.35,2112.06)
  round 39.37 smd far side: 10(1545,2608) 10(1545,2668) 10(1545,2728) 10(1545,2788)

## Via types
v1: diameter 20, hole 10, Top Layer to Bottom Layer, tented both sides, 1511 vias
v2: diameter 15, hole 10, Top Layer to Bottom Layer, tented both sides, 7 vias
v3: diameter 25, hole 16, Top Layer to Bottom Layer, tented both sides, 5 vias
v4: diameter 16, hole 10, Top Layer to Bottom Layer, tented both sides, 4 vias
v5: diameter 12, hole 10, Top Layer to Bottom Layer, tented both sides, 3 vias
v6: diameter 30, hole 20, Top Layer to Bottom Layer, tented both sides, 1 vias
v7: diameter 20, hole 16, Top Layer to Bottom Layer, tented both sides, 1 vias

## Nets (pads, with @x,y where several pads share a name; then routed paths per layer and width w, separated by ;. In a path a pad name is that pad's centre, name@x,y a point inside that pad or via, vN(x,y) a via of type N, cw(c..) or ccw(c..) an arc to the next point about the centre after c; other vN are vias at no path point)
32K_IN: C23.2 U6.4 Y2.2 | length 195.4
  Top Layer w7: C23.2@1105,847 1105,925 1130.06,950.06 U6.4@1130.06,1032
32K_OUT: C24.2 U6.5 Y2.1 | length 188.4
  Top Layer w7: U6.5@1149.74,1032 1149.74,911.26 1158,903 C24.2@1158,847
A5: USB1.A5
A8: USB1.A8
AIN1: C4.1 D2.2 J2.2 pad.10@267.35,351.06 R5.2 R23.2 | length 1291.8
  Top Layer w10: v1(54.74,729.24) 57.79,726.19 R23.2@80.24,726.19 ; v1(107,394) C4.1@107,421 ; v1(422,390) 432,400 R5.2@432,413
  Top Layer w20: C4.1@107,421 107.5,420.5 D2.2@176.66,420.5 180.5,420.5 205,396 v1@205,264
  PWR w10: v1(54.74,729.24) 33,707.51 33,685 107,611 v1(107,394)
  Bottom Layer w10: v1(107,394) 108,395 157,395 191,429 383,429 v1(422,390)
  Bottom Layer w12: v1(204,264) 265,325 265,348.71 pad.10@267.35,351.06
  Bottom Layer w20: v1(204,264) 204,218 239.37,182.63 J2.2@280,182.63
AIN2: C5.2 D2.3 J2.3 pad.10@167.35,351.06 R6.2 R18.2 | length 1017.1
  Top Layer w10: v1(57.74,693.24) 65.15,685.83 R18.2@80.24,685.83 ; C5.2@334,453 343,453 383,413 R6.2@392,413
  Top Layer w20: v1(246,395) 246,407.16 D2.3@259.34,420.5 282.5,420.5 315,453 C5.2@334,453
  PWR w10: v1(57.74,693.24) 129,621.98 129,512 v1(246,395)
  PWR w20: v1(209,166) 245.87,202.87 245.87,394.87 v1(246,395)
  Bottom Layer w10: pad.10@167.35,351.06 211.29,395 v1(246,395)
  Bottom Layer w20: v1(209,166) 231.74,143.26 J2.3@280,143.26
ANT1: C56.1 R57.2 | length 71
  Bottom Layer w8.5: R57.2@406,3175 406,3246
ANT_GNSS: U10.90
ANT_MAIN: C55.1 R57.1 R60.1 U10.60 | length 475.8
  Bottom Layer w8.5: R57.1@406,3133 406,2819 ccw(c509,2819) U10.60@509,2716
ANTG: M1.14 R39.1 | length 75.7
  Top Layer w12: M1.14@235.47,1651.95 ccw(c315.07,1643.87) R39.1@262,1584
ANTG1: C37.1 C62.2 L7.2 RF1.1 | length 543.5
  Top Layer w8.5: C62.2@146,1532 C37.1@185,1532 ; C37.1@189.03,1532 ccw(c531.2,1605.66) 270.99,1371.58 RF1.1@454.56,1188
  Top Layer w13.7: C37.1@189,1532 C37.1@187,1532 185,1532 189,1536 189,1534 191,1532 233.5,1532 L7.2@237.5,1536
AP_READY: U10.3
BAT_NINT: R1.2 U6.3 W2.2@1859.12,551.07 | length 1715.8
  Top Layer w8: U6.3@1110.37,1032 1110.37,1067.37 1147,1104 v1(1147,1124) ; v1(1530,808) 1532,806 R1.2@1532,770 ; W2.2@1859.12,551.07 1908.07,551.07 v1(1911,554)
  Bottom Layer w8: v1(1147,1124) 1165.93,1124 1205.93,1164 1283,1164 1288,1159 1376.83,1159 1467,1068.83 1467,984 1542,909 ; v1(1530,808) 1530,897 1542,909 ; v1(1911,554) 1956,554 2010,608 2010,829 1950.5,888.5 ; 1951,889 1931,909 1542,909
BAT_VOL: C17.1 R21.2 R22.1 U6.10 | length 610.6
  Top Layer w8: v1(1224,1139) 1224,1097 1248.17,1072.83 U6.10@1248.17,1032 ; C17.1@1449,931 v1(1475,931) R21.2@1500,931 R22.1@1540,931
  Bottom Layer w8: v1(1224,1139) 1227,1142 1371.38,1142 1446,1067.38 1446,960 v1(1475,931)
CM_PWR_EN: R32.2 U6.21 | length 921.5
  Top Layer w8: v1(1392,1256) 1385,1249 1385,1214 1407.55,1191.45 U6.21@1446.98,1191.45 ; R32.2@1881,1220 1898,1203 v1(1898,1148)
  Bottom Layer w8: v1(1392,1256) 1392,1248 1619,1021 1883,1021 1898,1036 v1(1898,1148)
CM_PWRKEY: R34.2 U6.20 | length 482.9
  Top Layer w8: U6.20@1446.98,1171.76 1499.76,1171.76 v1(1534,1206) ; v1(1626,1303) 1638,1291 1777.84,1291 1800.84,1314 R34.2@1830,1314
  Bottom Layer w8: v1(1534,1206) 1550,1222 1550,1275 1578,1303 v1(1626,1303)